# Altium PCB PIPOCPUD_2006.PCBDOC (part 3 of 10)
Units mm, origin at the board's own origin, x right, y up, seen from the top; angles counter-clockwise.
Board outline 179.96 x 114.94 mm, 2 copper layers (Top Layer, Top, Bottom Layer, Bottom), stack 1.341 mm thick; 247 components, 222 nets, 910 pads, 491 vias.
Unrouted connection lines stored in the file: 2.
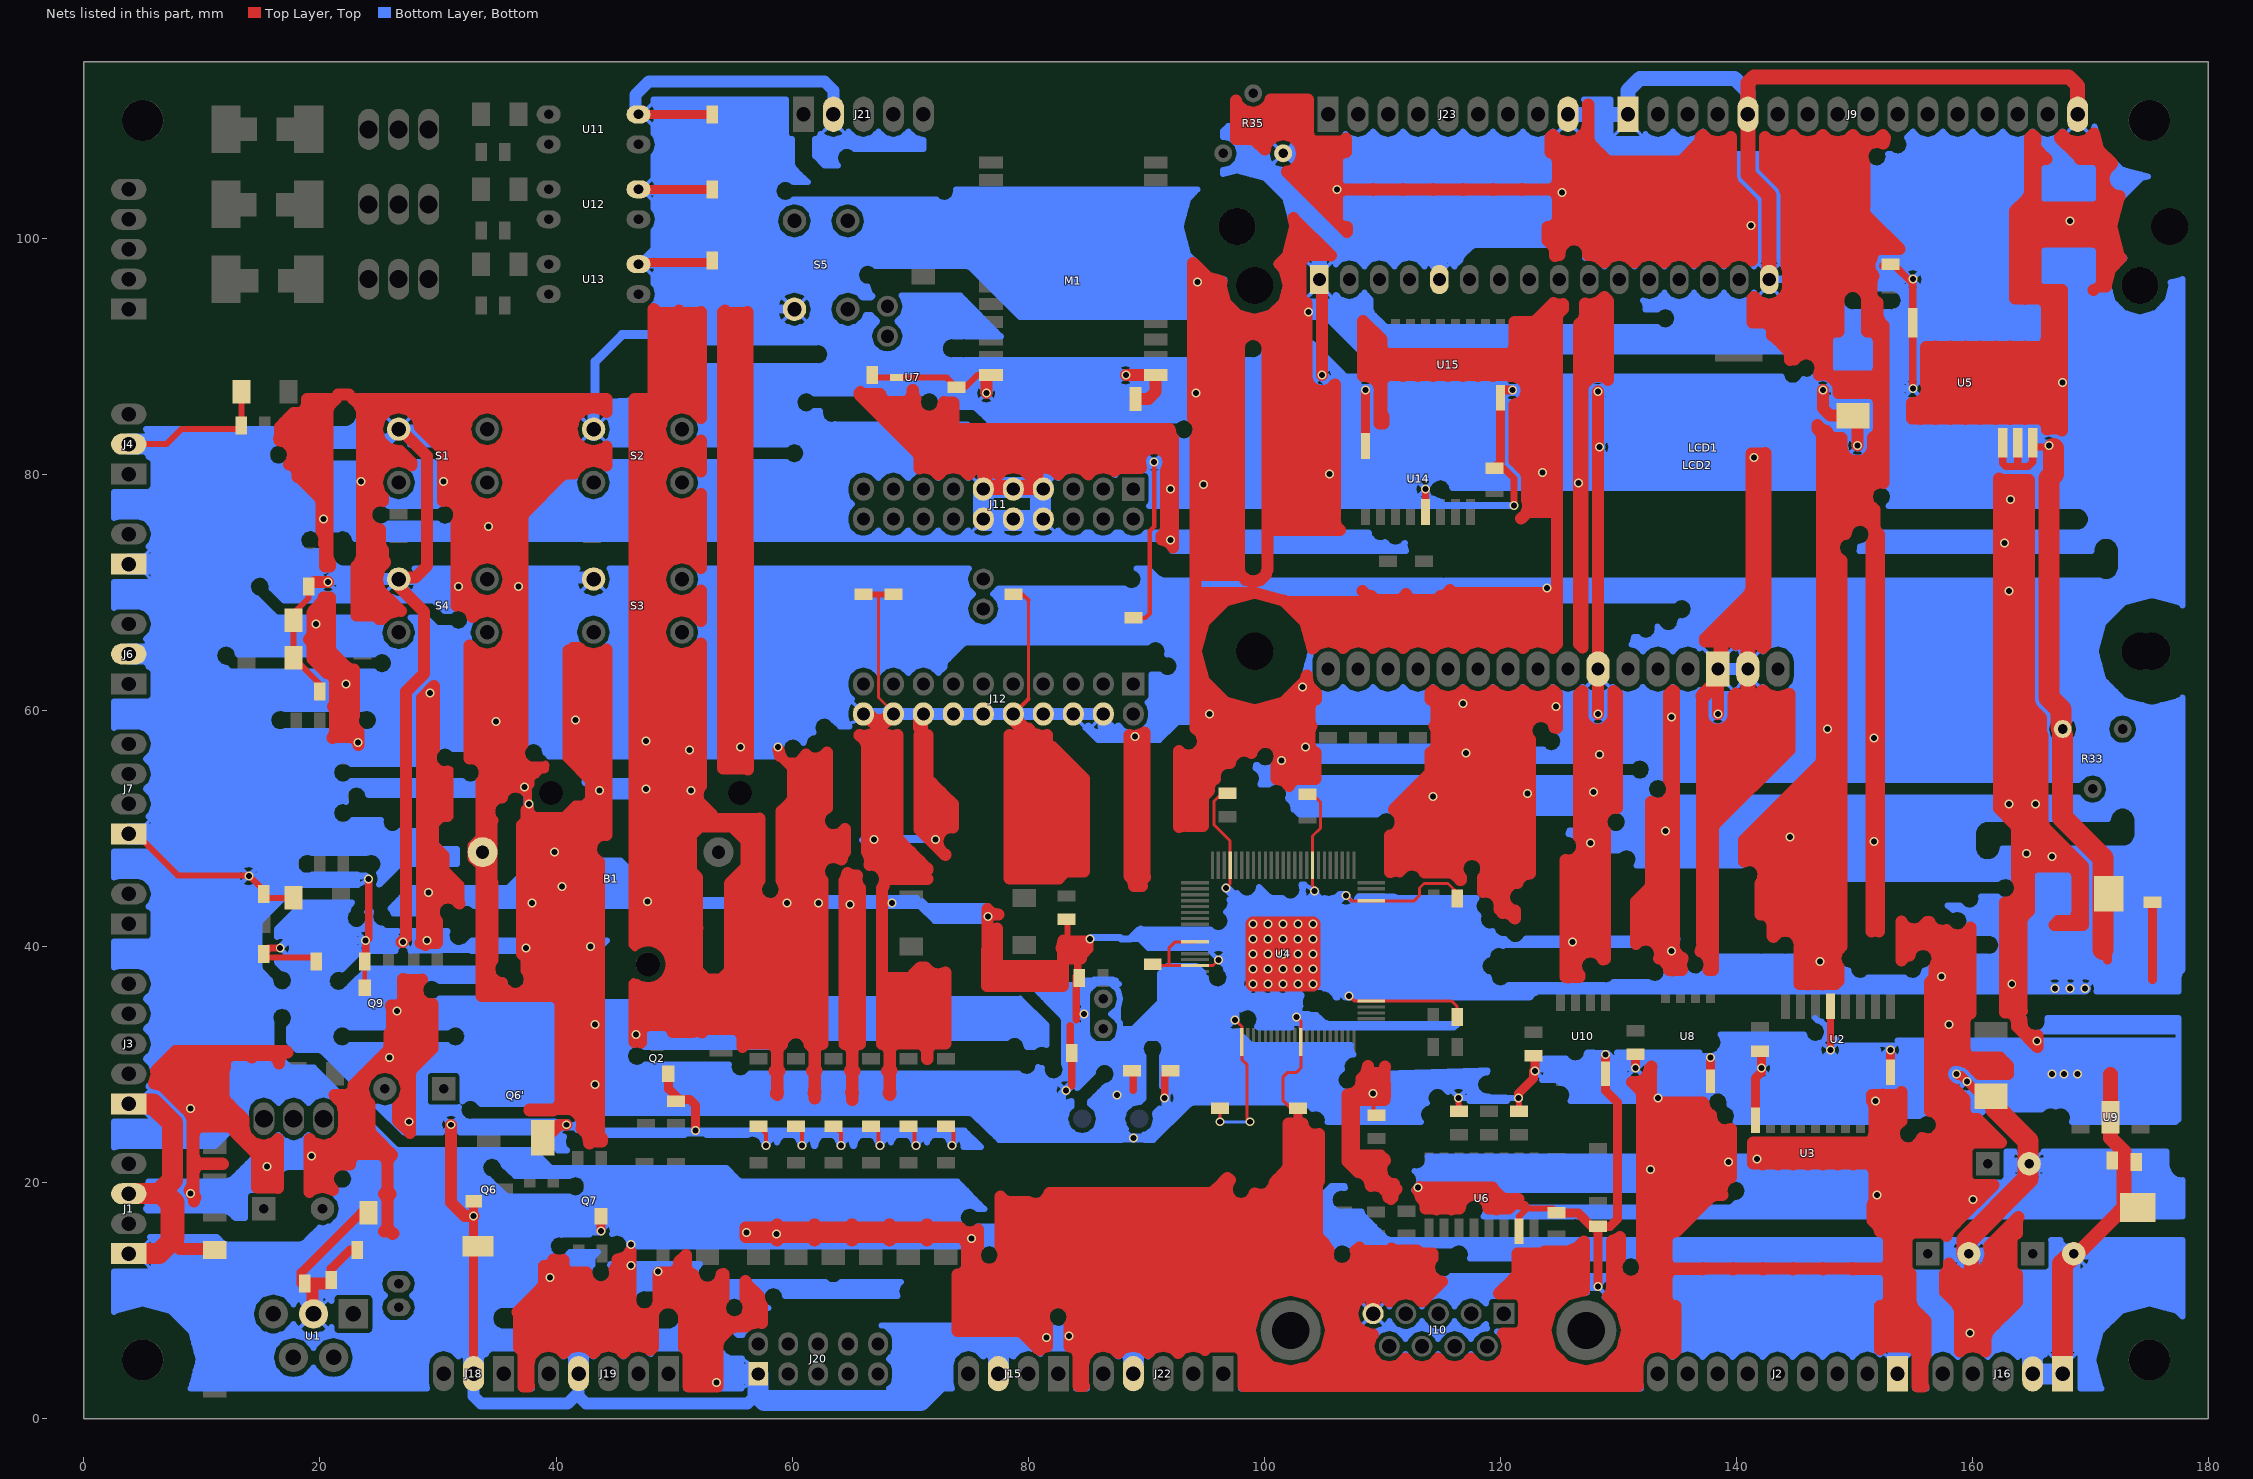
[diagram p3: the nets of this part, all layers, seen from the top]

## Via types
v1: diameter 0.762, hole 0.508, Top Layer, Top to Bottom Layer, Bottom, 489 vias
v2: diameter 0.864, hole 0.813, Top Layer, Top to Bottom Layer, Bottom, 2 vias

## Nets (pads, with @x,y where several pads share a name; then routed paths per layer and width w, separated by ;. In a path a pad name is that pad's centre, name@x,y a point inside that pad or via, vN(x,y) a via of type N, cw(c..) or ccw(c..) an arc to the next point about the centre after c; other vN are vias at no path point) (continued)
GND: (continued)
  Top Layer, Top w1.016: 6.02,19.05 6.985,18.085 6.985,14.605 ; 6.147,29.058 11.811,29.058 ; 6.299,28.296 11.811,28.296 ; 6.477,29.82 11.938,29.82 ; 7.239,30.582 12.217,30.582 ; 7.341,27.534 11.811,27.534 ; 7.62,14.859 8.128,14.351 11.176,14.351 R6.2@11.1,14.275 ; 8.103,26.772 12.116,26.772 ; v1@8.865,26.01 12.878,26.01 ; v1@9.093,19.152 v1@9.296,19.152 ; 9.195,19.914 9.296,19.914 ; 9.195,20.676 9.296,20.676 ; 9.195,21.438 9.652,21.438 ; 9.195,22.2 9.296,22.2 ; 9.195,22.962 9.296,22.962 ; 9.195,23.724 9.296,23.724 ; 9.195,24.486 9.525,24.486 ; 9.195,25.248 13.538,25.248 ; 12.649,24.486 13.564,24.486 ; 13.335,23.724 13.97,23.724 ; 14.097,22.962 16.459,22.962 ; 14.605,22.2 16.459,22.2 ; 14.656,19.914 16.459,19.914 ; 14.656,20.676 16.459,20.676 ; 14.656,21.438 16.459,21.438 ; 16.231,30.582 16.612,30.582 ; 16.612,83.617 20.65,83.617 ; 16.662,82.855 20.65,82.855 ; 16.967,84.379 20.65,84.379 ; 17.628,82.093 20.65,82.093 ; 17.653,81.331 20.65,81.331 ; 17.729,85.141 20.65,85.141 ; 17.882,80.569 20.65,80.569 ; 18.085,79.807 20.65,79.807 ; 18.898,85.903 20.853,85.903 ; 18.974,79.045 20.65,79.045 ; 19.101,19.431 19.482,19.431 ; 19.101,20.193 20.676,20.193 ; 19.101,20.955 20.853,20.955 ; 19.101,21.717 22.555,21.717 ; v1@19.101,22.479 25.959,22.479 ; 19.101,23.241 19.812,23.241 ; 19.355,64.668 21.234,64.668 ; 19.355,65.43 20.853,65.43 ; 19.355,66.954 20.853,66.954 ; 19.355,67.716 20.853,67.716 ; U1.3@19.456,8.865 19.456,8.661 19.355,8.56 19.355,10.795 C48.1@18.72,11.43 C5.1@20.625,11.43 ; 19.507,68.478 20.853,68.478 ; 19.558,70.866 v1(20.701,70.866) ; 19.736,78.283 20.65,78.283 ; 19.812,63.906 21.996,63.906 ; 20.117,75.235 20.65,75.235 ; v1@20.117,75.997 20.65,75.997 ; 20.117,76.759 20.65,76.759 ; 20.117,77.521 20.65,77.521 ; 20.193,69.24 20.853,69.24 ; 20.396,74.473 20.65,74.473 ; 20.422,72.949 20.65,72.949 ; 20.422,73.711 20.65,73.711 ; 20.65,63.144 22.885,63.144 ; 20.803,23.241 25.197,23.241 ; 20.853,66.192 19.253,66.192 ; 20.93,19.431 21.057,19.431 ; 21.133,57.81 23.266,57.81 ; 21.234,60.096 22.885,60.096 ; 21.285,58.572 22.911,58.572 ; 21.285,59.334 22.809,59.334 ; 21.285,60.858 22.885,60.858 ; 21.285,61.62 22.885,61.62 ; 21.285,62.382 22.885,62.382 ; 21.514,86.766 22.454,86.766 ; 21.539,27.051 23.851,27.051 ; 21.971,26.289 24.206,26.289 ; 22.022,24.765 24.206,24.765 ; 22.022,25.527 24.206,25.527 ; 22.784,27.813 23.647,27.813 ; 23.089,68.25 25.883,68.25 ; 23.089,69.012 26.264,69.012 ; 23.089,69.774 25.451,69.774 ; 23.089,70.536 24.943,70.536 ; 23.089,71.298 24.841,71.298 ; 23.089,72.06 25.044,72.06 ; 23.368,85.776 44.272,85.776 ; 23.47,72.822 25.4,72.822 ; 23.546,73.584 25.349,73.584 ; 23.546,74.346 25.095,74.346 ; 23.546,75.108 25.095,75.108 ; 23.546,75.87 24.155,75.87 ; 23.546,76.632 23.901,76.632 ; 23.546,77.394 24.257,77.394 ; 23.546,78.156 25.248,78.156 ; 23.546,78.918 24.892,78.918 ; v1@23.546,79.68 24.892,79.68 ; 23.546,80.442 25.248,80.442 ; 23.546,81.204 27.534,81.204 ; 23.546,81.966 26.594,81.966 ; 23.546,82.728 25.197,82.728 ; 23.546,83.49 24.867,83.49 ; 23.546,84.252 24.917,84.252 ; 23.546,85.014 25.298,85.014 ; 23.8,28.575 23.165,28.575 ; 23.927,29.337 24.359,29.337 ; 24.435,24.003 21.844,24.003 ; 24.689,30.099 28.27,30.099 ; 25.451,30.861 29.032,30.861 ; 25.603,18.847 25.425,19.025 25.603,19.202 25.705,19.507 25.705,21.717 25.603,22.022 25.298,22.327 24.994,22.428 23.241,22.428 22.936,22.327 22.631,22.022 22.555,21.717 ; 25.654,18.669 25.756,18.669 ; 25.679,19.431 25.73,19.431 ; 25.679,21.717 25.73,21.717 ; 25.705,16.383 25.73,16.383 ; 25.705,17.145 25.73,17.145 ; 25.705,17.907 25.73,17.907 ; 25.705,18.542 25.705,16.332 25.603,16.027 25.425,15.85 25.73,15.85 26.035,15.748 26.162,15.621 26.213,15.697 26.111,15.723 25.806,16.027 25.73,16.332 25.73,18.542 25.806,18.847 25.984,19.025 25.806,19.202 25.73,19.507 25.73,21.717 ; 25.705,20.193 25.73,20.193 ; 25.705,20.955 25.73,20.955 ; 25.883,31.623 29.54,31.623 ; 25.883,32.385 29.54,32.385 ; 26.086,33.147 29.54,33.147 ; 26.086,33.909 29.54,33.909 ; 26.086,34.671 29.54,34.671 ; 26.594,25.527 27.635,25.527 ; 26.594,26.289 27.635,26.289 ; 26.619,29.337 27.661,29.337 ; S1.1@26.67,83.82 26.797,83.82 29.083,81.534 29.083,72.263 28.067,71.247 26.67,71.247 S4.1@26.67,71.12 26.543,70.993 26.543,70.612 28.829,68.326 28.829,63.119 27.305,61.595 27.305,40.767 26.924,40.386 v1(27.051,40.386) ; 26.721,81.966 26.772,81.966 ; 26.975,35.433 28.626,35.433 ; 27.051,24.765 27.635,24.765 ; 27.051,36.195 28.245,36.195 ; 27.051,36.957 28.423,36.957 ; 27.127,27.051 27.635,27.051 ; 27.178,28.575 27.635,28.575 ; 27.33,27.813 27.635,27.813 ; 28.016,85.014 32.791,85.014 ; 28.397,84.252 32.41,84.252 ; 28.626,40.869 29.921,40.869 ; 28.626,41.631 29.921,41.631 ; 28.626,42.393 29.743,42.393 ; 28.626,43.155 29.667,43.155 ; 28.626,43.917 30.175,43.917 ; 28.626,51.537 30.81,51.537 ; 28.626,52.299 30.81,52.299 ; 28.626,53.061 30.81,53.061 ; 28.626,53.823 30.81,53.823 ; 28.626,54.585 30.81,54.585 ; 28.626,55.347 29.54,55.347 ; 28.626,56.109 29.388,56.109 ; 28.626,56.871 29.667,56.871 ; 28.626,57.633 29.667,57.633 ; 28.626,58.395 29.667,58.395 ; 28.626,59.157 29.667,59.157 ; 28.626,59.919 29.667,59.919 ; 28.626,60.681 29.667,60.681 ; 28.981,83.49 32.36,83.49 ; v1@29.032,61.443 v1@29.667,61.443 ; 29.743,82.728 32.69,82.728 ; 30.328,81.966 34.087,81.966 ; 30.404,78.156 32.741,78.156 ; 30.404,78.918 32.385,78.918 ; v1@30.404,79.68 32.385,79.68 ; 30.404,80.442 32.741,80.442 ; 30.404,81.204 44.272,81.204 ; 30.81,54.813 30.607,54.762 29.972,54.915 29.515,55.372 29.362,56.007 29.515,56.617 29.667,56.744 29.667,62.078 28.626,61.036 28.626,41.021 28.626,40.488 28.524,40.284 28.829,40.208 28.931,40.107 29.032,40.208 29.337,40.31 29.921,40.31 29.921,42.164 29.769,42.291 29.616,42.926 29.769,43.536 30.226,43.993 30.861,44.145 31.471,43.993 31.826,43.637 ; v1(31.115,24.892) 31.115,18.288 32.258,17.145 v1(33.02,17.145) ; 31.471,77.394 37.948,77.394 ; 31.547,69.012 37.16,69.012 ; 31.547,69.774 32.944,69.774 ; v1@31.547,70.536 32.436,70.536 ; 31.547,71.298 32.334,71.298 ; 31.547,72.06 32.537,72.06 ; 31.547,72.822 33.553,72.822 ; 31.547,73.584 37.16,73.584 ; 31.547,74.346 37.16,74.346 ; 31.547,75.108 37.16,75.108 ; 31.572,75.87 37.16,75.87 ; 31.826,76.632 37.262,76.632 ; 32.69,56.058 36.932,56.058 ; 32.69,56.82 36.957,56.82 ; 32.69,57.582 37.16,57.582 ; 32.69,58.344 37.16,58.344 ; 32.69,59.106 37.16,59.106 ; 32.69,59.868 37.16,59.868 ; 32.69,60.63 37.16,60.63 ; 32.69,61.392 37.16,61.392 ; 32.69,62.154 37.16,62.154 ; 32.69,62.916 37.16,62.916 ; 32.69,63.678 37.16,63.678 ; 32.69,64.44 37.16,64.44 ; 32.69,65.202 32.995,65.202 ; 32.817,68.25 33.376,68.25 ; 33.706,36.246 35.839,36.246 ; 33.706,37.008 34.976,37.008 ; 33.706,37.77 34.392,37.77 ; 33.706,38.532 34.417,38.532 ; 33.706,39.294 34.62,39.294 ; 33.706,40.056 34.62,40.056 ; 33.706,40.818 34.62,40.818 ; 33.706,41.58 34.62,41.58 ; 33.706,42.342 34.62,42.342 ; 33.706,43.104 34.62,43.104 ; 33.706,43.866 34.62,43.866 ; 33.706,44.628 34.62,44.628 ; 33.706,45.034 33.706,35.789 39.675,35.789 39.98,35.687 40.284,35.382 40.386,35.077 40.386,26.873 40.284,26.568 39.98,26.264 39.675,26.187 37.77,26.187 37.77,26.086 37.77,26.111 39.726,26.111 39.98,26.213 41.148,26.213 41.631,26.01 42.012,25.629 42.215,25.146 42.215,24.613 42.164,24.562 42.189,24.562 42.647,24.105 42.799,23.495 42.774,23.343 42.824,23.292 42.901,23.368 43.205,23.47 43.891,23.47 43.891,23.724 43.764,23.851 43.688,24.003 43.637,24.181 43.637,47.168 43.561,47.168 43.104,47.625 42.951,48.26 43.104,48.87 43.561,49.327 44.196,49.479 44.272,49.454 44.272,65.151 44.094,64.999 43.18,64.745 42.24,64.999 41.961,65.278 41.453,65.278 41.3,65.126 41.072,65.049 41.072,58.293 ; 33.706,45.39 33.706,51.613 33.706,45.288 33.909,45.085 34.544,45.085 34.544,50.546 34.544,46.99 33.782,46.228 33.782,46.736 33.02,47.498 33.02,48.514 33.528,49.022 33.528,48.006 34.62,45.39 ; 33.706,50.724 34.569,50.724 ; 33.706,51.003 33.706,53.975 33.833,54.102 33.985,54.737 33.833,55.347 33.376,55.804 32.766,55.956 32.69,55.931 32.69,65.507 33.223,64.973 34.163,64.719 35.077,64.973 35.763,65.659 36.017,66.599 35.763,67.513 35.077,68.199 34.163,68.453 33.223,68.199 32.918,67.894 32.817,68.301 32.36,68.758 31.75,68.91 31.547,68.859 31.547,75.819 31.674,75.946 31.826,76.581 31.674,77.191 31.217,77.648 30.607,77.8 30.404,77.749 30.404,81.788 30.201,82.271 28.473,83.972 28.27,84.734 27.584,85.42 26.67,85.674 25.73,85.42 25.044,84.734 24.79,83.82 25.044,82.88 25.73,82.194 26.67,81.94 26.746,81.966 27.762,80.975 27.762,80.747 27.584,80.899 26.67,81.153 25.73,80.899 25.044,80.213 24.79,79.299 25.044,78.359 25.349,78.054 25.349,77.749 25.146,77.8 24.511,77.648 24.054,77.191 23.901,76.581 24.054,75.946 24.511,75.489 25.095,75.336 25.095,75.26 25.095,74.066 25.171,73.762 25.349,73.584 ; 33.706,51.486 34.315,51.486 ; 33.706,52.248 34.671,52.248 ; 33.706,53.01 35.56,53.01 ; 33.706,53.772 37.668,53.772 ; 33.833,55.296 37.516,55.296 ; 33.934,54.534 37.871,54.534 ; 34.214,81.966 43.104,81.966 ; 34.62,45.034 34.62,38.837 34.468,38.71 34.315,38.1 34.468,37.465 34.925,37.008 35.408,36.881 35.484,36.576 35.941,36.119 36.576,35.966 37.186,36.119 37.643,36.576 37.795,37.211 37.643,37.821 37.516,37.948 37.516,38.786 37.44,38.964 37.363,39.116 37.135,39.37 37.135,50.267 37.363,50.521 37.44,50.673 37.516,50.851 37.516,51.562 37.643,51.689 ; 34.62,50.673 34.468,50.8 34.315,51.435 34.468,52.045 34.925,52.502 35.408,52.629 35.484,52.934 35.941,53.391 36.576,53.543 v1@37.186,53.391 ; 34.747,72.822 37.16,72.822 ; 34.925,68.25 37.16,68.25 ; 35.306,65.202 37.16,65.202 ; 35.357,69.774 37.16,69.774 ; 35.509,85.014 41.808,85.014 ; 35.56,78.156 38.71,78.156 ; 35.56,80.442 41.758,80.442 ; 35.611,82.728 41.707,82.728 ; 35.763,72.06 37.16,72.06 ; 35.789,67.488 37.16,67.488 ; 35.839,65.964 37.16,65.964 ; 35.865,70.536 v1@37.16,70.536 ; 35.89,84.252 41.427,84.252 ; 35.916,78.918 39.472,78.918 ; 35.916,79.68 40.234,79.68 ; 35.941,83.49 41.377,83.49 ; 35.966,71.298 37.16,71.298 ; 35.992,66.726 37.16,66.726 ; 36.855,6.528 48.209,6.528 ; 36.855,7.29 48.209,7.29 ; 36.855,8.052 48.209,8.052 ; 36.855,8.814 47.422,8.814 ; 37.135,5.766 38.303,5.766 ; v1@37.135,40.056 43.637,40.056 ; 37.135,40.818 43.637,40.818 ; 37.135,41.58 43.637,41.58 ; 37.135,42.342 43.637,42.342 ; 37.135,43.104 43.637,43.104 ; 37.135,43.866 43.637,43.866 ; 37.135,44.628 43.637,44.628 ; 37.135,45.39 43.637,45.39 ; 37.135,46.152 43.637,46.152 ; 37.135,46.914 43.637,46.914 ; 37.135,47.676 43.104,47.676 ; 37.135,48.438 43.002,48.438 ; 37.135,49.2 43.434,49.2 ; 37.135,49.962 44.272,49.962 ; 37.211,39.294 43.637,39.294 ; 37.262,3.48 37.668,3.48 ; 37.262,4.242 37.668,4.242 ; 37.262,5.004 37.744,5.004 ; 37.287,9.576 46.38,9.576 ; 37.287,36.246 43.637,36.246 ; 37.44,50.724 44.272,50.724 ; 37.516,38.532 43.637,38.532 ; 37.643,37.77 43.637,37.77 ; 37.744,37.008 43.637,37.008 ; 38.049,10.338 46.304,10.338 ; 38.1,55.143 37.465,55.296 37.008,55.753 36.855,56.388 37.008,56.998 37.16,57.125 37.16,76.378 37.211,76.556 37.287,76.708 40.488,79.908 40.64,79.985 40.818,80.061 41.504,80.061 41.554,80.213 42.24,80.899 43.18,81.153 44.094,80.899 44.272,80.747 44.272,82.347 44.094,82.194 43.18,81.94 42.24,82.194 41.554,82.88 41.3,83.82 41.554,84.734 42.24,85.42 43.18,85.674 44.094,85.42 44.272,85.268 44.272,86.36 22.809,86.36 22.911,86.309 23.317,85.903 23.546,85.369 23.546,74.574 23.546,72.974 23.317,72.441 23.089,72.212 23.089,68.047 24.486,68.047 24.79,67.945 25.019,67.742 25.248,67.742 25.73,68.199 26.67,68.453 26.873,68.402 25.781,69.469 25.73,69.494 25.044,70.18 24.79,71.12 25.044,72.034 25.527,72.517 25.349,72.974 25.349,73.584 ; 38.786,11.1 46.304,11.1 ; Q6'.3@38.887,23.8 39.345,24.257 39.624,24.257 40.259,24.892 v1(40.894,24.892) ; 38.964,11.862 42.697,11.862 ; 38.964,12.624 40.843,12.624 ; 39.751,13.386 40.234,13.386 ; 40.056,26.34 43.637,26.34 ; 40.208,35.484 43.637,35.484 ; 40.361,13.386 40.615,13.386 ; 40.386,27.102 43.637,27.102 ; 40.386,27.864 43.637,27.864 ; 40.386,28.626 43.637,28.626 ; 40.386,29.388 43.637,29.388 ; 40.386,30.15 43.637,30.15 ; 40.386,30.912 43.637,30.912 ; 40.386,31.674 43.637,31.674 ; 40.386,32.436 43.637,32.436 ; 40.386,33.198 43.637,33.198 ; 40.386,33.96 43.637,33.96 ; 40.386,34.722 43.637,34.722 ; 40.411,5.766 40.843,5.766 ; 41.072,56.058 44.272,56.058 ; 41.072,56.82 44.272,56.82 ; 41.072,57.582 44.272,57.582 ; 41.072,58.344 44.272,58.344 ; 41.072,59.106 44.272,59.106 ; 41.072,59.868 44.272,59.868 ; 41.072,60.63 44.272,60.63 ; 41.072,61.392 44.272,61.392 ; 41.072,62.154 44.272,62.154 ; 41.072,62.916 44.272,62.916 ; 41.072,63.678 44.272,63.678 ; 41.072,64.44 44.272,64.44 ; 41.377,65.202 42.037,65.202 ; 41.885,51.486 44.272,51.486 ; 41.885,55.296 44.272,55.296 ; 42.012,25.578 43.637,25.578 ; 42.215,24.816 43.637,24.816 ; 42.647,24.054 43.688,24.054 ; 42.951,5.766 43.383,5.766 ; 43.231,81.966 44.272,81.966 ; 44.907,11.862 46.304,11.862 ; 44.958,12.624 v1@46.304,12.624 ; 45.187,13.386 46.304,13.386 ; 45.491,5.766 45.923,5.766 ; 46.279,14.148 46.304,14.148 ; v1@46.66,32.436 47.193,32.436 ; 46.66,33.198 47.523,33.198 ; 46.66,33.96 62.56,33.96 ; 46.66,34.722 62.56,34.722 ; 46.66,35.484 62.56,35.484 ; 46.66,35.941 46.66,31.902 46.863,31.953 47.193,31.877 47.193,32.614 47.269,32.944 47.574,33.249 47.904,33.325 49.2,33.325 49.53,33.249 49.835,32.944 49.886,32.766 51.613,32.766 51.74,32.817 52.121,32.817 52.349,32.715 52.553,32.893 52.857,32.995 55.067,32.995 55.372,32.893 55.677,32.588 55.778,32.283 55.778,31.496 55.956,31.674 56.261,31.775 58.014,31.775 58.318,31.674 58.623,31.369 58.725,31.064 58.725,29.87 58.623,29.566 58.522,29.464 58.623,29.362 58.725,29.058 58.725,27.864 58.649,27.584 58.649,27.508 58.725,27.508 58.776,27.432 58.801,27.584 58.75,27.864 ; 46.66,36.246 62.56,36.246 ; 46.66,40.818 51.105,40.818 ; 46.66,40.919 46.66,86.36 48.26,86.36 48.26,94.005 48.514,93.751 48.819,93.675 50.013,93.675 50.317,93.751 50.419,93.853 50.521,93.751 50.825,93.675 52.019,93.675 52.273,93.726 52.273,84.76 51.587,85.42 50.673,85.674 49.733,85.42 49.047,84.734 48.793,83.82 49.047,82.88 49.733,82.194 50.673,81.94 51.587,82.194 52.273,82.855 52.273,80.239 51.587,80.899 50.673,81.153 49.733,80.899 49.047,80.213 48.793,79.299 49.047,78.359 49.733,77.673 50.673,77.419 51.587,77.673 52.273,78.334 52.273,72.06 51.587,72.72 50.673,72.974 49.733,72.72 49.047,72.034 48.793,71.12 49.047,70.18 49.733,69.494 50.673,69.24 51.587,69.494 52.273,70.155 52.273,67.564 51.587,68.224 50.673,68.478 49.733,68.224 49.047,67.539 48.793,66.624 49.047,65.684 49.733,64.999 50.673,64.745 51.587,64.999 52.273,65.659 52.273,53.569 52.121,53.442 51.968,52.832 52.121,52.197 52.578,51.74 ; 46.66,41.58 51.994,41.58 ; 46.66,43.104 51.105,43.104 ; 46.66,43.866 51.257,43.866 ; 46.66,44.628 51.359,44.628 ; 46.66,46.152 51.613,46.152 ; 46.66,46.914 51.13,46.914 ; 46.66,47.676 51.13,47.676 ; 46.66,48.438 50.851,48.438 ; 46.66,49.2 51.105,49.2 ; 46.66,49.962 51.511,49.962 ; 46.66,50.724 57.226,50.724 ; 46.66,51.486 52.248,51.486 ; 46.66,52.248 52.121,52.248 ; 46.66,53.01 52.019,53.01 ; 46.66,53.772 52.273,53.772 ; 46.66,54.534 52.273,54.534 ; 46.66,55.296 52.273,55.296 ; 46.66,56.058 52.273,56.058 ; 46.66,56.82 52.273,56.82 ; 46.66,57.582 52.273,57.582 ; 46.66,58.344 52.273,58.344 ; 46.66,59.106 52.273,59.106 ; 46.66,59.868 52.273,59.868 ; 46.66,60.63 52.273,60.63 ; 46.66,61.392 52.273,61.392 ; 46.66,62.154 52.273,62.154 ; 46.66,62.916 52.273,62.916 ; 46.66,63.678 52.273,63.678 ; 46.66,64.44 52.273,64.44 ; 46.66,65.202 49.53,65.202 ; 46.66,65.964 48.971,65.964 ; 46.66,66.726 48.819,66.726 ; 46.66,67.488 49.022,67.488 ; 46.66,68.25 49.784,68.25 ; 46.66,69.012 52.273,69.012 ; 46.66,69.774 49.454,69.774 ; 46.66,70.536 48.946,70.536 ; 46.66,71.298 48.844,71.298 ; 46.66,72.06 49.047,72.06 ; 46.66,72.822 50.063,72.822 ; 46.66,73.584 52.273,73.584 ; 46.66,74.346 52.273,74.346 ; 46.66,75.108 52.273,75.108 ; 46.66,75.87 52.273,75.87 ; 46.66,76.632 52.273,76.632 ; 46.66,77.394 52.273,77.394 ; 46.66,78.156 49.251,78.156 ; 46.66,78.918 48.895,78.918 ; 46.66,79.68 48.895,79.68 ; 46.66,80.442 49.251,80.442 ; 46.66,81.204 52.273,81.204 ; 46.66,81.966 50.597,81.966 ; 46.66,82.728 49.2,82.728 ; 46.66,83.49 48.87,83.49 ; 46.66,84.252 48.92,84.252 ; 46.66,85.014 49.301,85.014 ; 46.66,85.776 52.273,85.776 ; 47.549,8.814 48.209,8.814 ; 48.26,86.538 52.273,86.538 ; 48.26,87.3 52.273,87.3 ; 48.26,88.062 52.273,88.062 ; 48.26,88.824 52.273,88.824 ; 48.26,89.586 52.273,89.586 ; 48.26,90.348 52.273,90.348 ; 48.26,91.11 52.273,91.11 ; 48.26,91.872 52.273,91.872 ; 48.26,92.634 52.273,92.634 ; 48.26,93.396 52.273,93.396 ; 48.59,9.576 48.717,9.576 ; 48.692,10.338 54.178,10.338 ; 48.692,11.1 52.756,11.1 ; 48.692,11.862 51.714,11.862 ; 49.581,33.198 62.56,33.198 ; 50.089,39.294 51.359,39.294 ; 50.165,12.624 51.079,12.624 ; 50.165,48.768 51.689,50.292 52.959,50.292 ; 50.19,37.77 50.876,37.77 ; 50.317,9.576 53.924,9.576 ; 50.444,37.008 51.359,37.008 62.56,37.008 ; 50.521,13.386 51.029,13.386 ; 50.724,81.966 52.273,81.966 ; 50.8,49.276 51.308,49.276 52.197,50.165 52.451,50.165 52.578,50.292 53.086,50.292 53.213,50.419 55.626,50.419 56.261,49.784 56.134,50.165 56.515,49.784 56.515,46.609 55.499,45.593 54.991,45.593 ; 50.825,8.814 54.026,8.814 ; 50.851,6.528 53.772,6.528 ; 50.851,7.29 54.381,7.29 ; 50.851,8.052 56.617,8.052 ; 51.105,5.766 53.67,5.766 ; 51.232,3.48 53.67,3.48 ; 51.232,4.242 53.67,4.242 ; 51.232,5.004 53.67,5.004 ; 51.257,72.822 52.273,72.822 ; 51.435,46.736 50.165,39.497 50.165,40.64 48.514,42.291 47.244,42.291 50.8,42.291 51.562,43.053 51.562,45.593 47.117,45.593 47.498,45.212 50.927,45.212 50.927,38.1 51.943,37.084 52.832,37.084 51.943,37.973 51.943,45.847 51.435,46.355 51.435,49.022 ; 51.537,68.25 52.273,68.25 ; 51.791,65.202 52.273,65.202 ; 51.867,69.774 52.273,69.774 ; 52.019,85.014 52.273,85.014 ; 52.07,78.156 52.273,78.156 ; 52.07,80.442 52.273,80.442 ; 52.121,82.728 52.273,82.728 ; 52.883,11.1 54.178,11.1 ; 53.924,11.862 54.178,11.862 ; 54.153,55.296 56.21,55.296 ; 54.153,55.448 54.153,93.726 54.229,93.751 54.331,93.853 54.432,93.751 54.737,93.675 55.931,93.675 56.21,93.726 56.261,54.991 56.185,55.067 56.083,55.067 54.153,55.067 56.21,55.067 ; 54.153,56.058 56.21,56.058 ; 54.153,56.82 56.21,56.82 ; 54.153,57.582 56.21,57.582 ; 54.153,58.344 56.21,58.344 ; 54.153,59.106 56.21,59.106 ; 54.153,59.868 56.21,59.868 ; 54.153,60.63 56.21,60.63 ; 54.153,61.392 56.21,61.392 ; 54.153,62.154 56.21,62.154 ; 54.153,62.916 56.21,62.916 ; 54.153,63.678 56.21,63.678 ; 54.153,64.44 56.21,64.44 ; 54.153,65.202 56.21,65.202 ; 54.153,65.964 56.21,65.964 ; 54.153,66.726 56.21,66.726 ; 54.153,67.488 56.21,67.488 ; 54.153,68.25 56.21,68.25 ; 54.153,69.012 56.21,69.012 ; 54.153,69.774 56.21,69.774 ; 54.153,70.536 56.21,70.536 ; 54.153,71.298 56.21,71.298 ; 54.153,72.06 56.21,72.06 ; 54.153,72.822 56.21,72.822 ; 54.153,73.584 56.21,73.584 ; 54.153,74.346 56.21,74.346 ; 54.153,75.108 56.21,75.108 ; 54.153,75.87 56.21,75.87 ; 54.153,76.632 56.21,76.632 ; 54.153,77.394 56.21,77.394 ; 54.153,78.156 56.21,78.156 ; 54.153,78.918 56.21,78.918 ; 54.153,79.68 56.21,79.68 ; 54.153,80.442 56.21,80.442 ; 54.153,81.204 56.21,81.204 ; 54.153,81.966 56.21,81.966 ; 54.153,82.728 56.21,82.728 ; 54.153,83.49 56.21,83.49 ; 54.153,84.252 56.21,84.252 ; 54.153,85.014 56.21,85.014 ; 54.153,85.776 56.21,85.776 ; 54.153,86.538 56.21,86.538 ; 54.153,87.3 56.21,87.3 ; 54.153,88.062 56.21,88.062 ; 54.153,88.824 56.21,88.824 ; 54.153,89.586 56.21,89.586 ; 54.153,90.348 56.21,90.348 ; 54.153,91.11 56.21,91.11 ; 54.153,91.872 56.21,91.872 ; 54.153,92.634 56.21,92.634 ; 54.153,93.396 56.21,93.396 ; 55.169,40.818 62.56,40.818 ; 55.296,39.294 62.56,39.294 ; 55.296,43.866 57.429,43.866 ; 55.499,49.784 56.134,49.149 56.134,46.736 54.991,45.593 ; 55.55,43.104 55.55,41.986 56.007,41.529 61.849,41.529 61.849,42.545 56.007,42.545 56.007,43.053 61.341,43.053 62.56,43.104 ; 55.728,32.436 59.563,32.436 ; 55.778,31.674 55.931,31.674 ; 55.931,46.152 57.226,46.152 ; 55.956,49.962 57.226,49.962 ; 56.058,10.338 57.175,10.338 ; 56.058,11.1 56.439,11.1 ; v1@56.058,15.672 75.768,15.672 ; 56.058,37.77 57.099,37.77 62.56,37.77 ; 56.185,8.814 57.429,8.814 ; 56.21,44.628 56.972,44.628 ; 56.21,47.676 57.226,47.676 ; 56.21,49.2 57.226,49.2 ; 56.286,9.576 57.429,9.576 ; 56.337,48.438 57.226,48.438 ; 56.642,46.101 56.642,47.244 56.769,45.974 55.626,44.831 56.261,45.72 55.245,44.704 55.245,40.259 55.88,40.894 55.88,44.958 56.007,44.831 56.007,43.561 56.007,38.608 61.849,38.608 61.849,40.132 55.626,40.132 55.626,37.973 54.864,37.211 54.229,37.211 54.991,37.973 54.991,39.37 54.737,39.624 54.737,45.339 54.991,45.593 ; 57.226,50.851 57.226,45.568 57.074,45.441 56.921,44.831 57.074,44.196 57.531,43.739 58.166,43.586 58.776,43.739 59.233,44.196 59.385,44.831 59.233,45.441 59.106,45.568 ; 58.344,31.674 59.106,31.674 ; 58.623,29.388 58.826,29.388 ; 58.699,16.434 58.75,16.434 ; 58.699,27.864 58.75,27.864 ; 58.725,28.626 58.75,28.626 ; 58.725,30.15 58.75,30.15 ; 58.725,30.912 58.75,30.912 ; v1@58.852,56.693 58.979,56.134 ; 58.877,43.866 v1@62.56,43.866 ; 59.106,46.152 62.306,46.152 ; 59.106,46.914 62.408,46.914 ; 59.106,47.676 64.262,47.676 ; 59.106,48.438 64.465,48.438 ; 59.106,49.2 64.465,49.2 ; 59.106,49.962 62.509,49.962 ; 59.106,50.724 62.255,50.724 ; 59.106,51.486 62.611,51.486 ; 59.182,48.514 59.182,51.308 59.944,52.07 ; 59.233,45.39 62.56,45.39 ; 59.334,44.628 62.56,44.628 ; 60.503,54.534 62.941,54.534 ; 60.681,55.677 61.138,56.134 61.163,56.261 61.341,56.058 61.976,55.905 62.586,56.058 62.941,56.413 62.941,51.74 62.865,51.74 62.408,51.283 62.255,50.673 62.408,50.038 62.865,49.581 63.5,49.428 64.11,49.581 64.465,49.936 64.465,47.981 64.313,47.854 64.186,47.346 64.11,47.422 63.5,47.574 62.865,47.422 62.408,46.965 62.255,46.355 62.408,45.72 62.56,45.593 62.56,31.75 62.306,31.674 62.001,31.369 61.925,31.064 61.925,29.87 62.001,29.566 62.078,29.489 62.001,29.388 ; 61.036,56.058 61.417,56.058 ; 61.062,32.436 62.56,32.436 ; 61.519,31.674 62.281,31.674 ; 61.798,29.388 62.001,29.388 ; 61.874,16.434 61.925,16.434 ; 61.874,27.864 61.925,27.864 ; 61.9,28.626 61.925,28.626 ; 61.9,30.15 61.925,30.15 ; 61.9,30.912 61.925,30.912 ; 62.509,56.058 62.941,56.058 ; 64.44,32.309 65.735,32.309 ; 64.44,33.071 65.735,33.071 ; 64.44,33.833 65.735,33.833 ; 64.44,34.595 65.735,34.595 ; 64.44,35.357 65.735,35.357 ; 64.44,36.119 65.735,36.119 ; 64.44,36.881 65.735,36.881 ; 64.44,37.643 65.735,37.643 ; 64.44,38.405 65.735,38.405 ; 64.44,39.167 65.735,39.167 ; 64.44,39.929 65.735,39.929 ; 64.44,40.691 65.735,40.691 ; 64.44,41.453 65.735,41.453 ; 64.44,42.215 65.735,42.215 ; 64.44,42.977 65.735,42.977 ; 64.44,43.739 65.735,43.739 ; 64.44,44.501 65.735,44.501 ; 64.44,45.263 65.557,45.263 ; 64.643,46.025 65.303,46.025 ; 64.821,31.547 65.329,31.547 ; 65.024,27.737 65.126,27.737 ; 65.024,29.261 65.151,29.261 ; 65.049,16.434 65.1,16.434 ; 65.075,28.499 65.1,28.499 ; 65.075,30.023 65.1,30.023 ; 65.075,30.785 65.1,30.785 ; 65.481,46.025 65.507,46.025 ; 65.71,57.887 65.761,57.887 ; 65.71,86.766 67.488,86.766 ; 66.294,57.887 68.301,57.887 ; 66.319,57.125 68.91,57.125 ; 66.345,48.743 69.291,48.743 ; 66.345,49.505 68.91,49.505 ; 66.345,50.267 68.91,50.267 ; 66.345,51.029 68.91,51.029 ; 66.345,51.791 68.91,51.791 ; 66.345,52.553 68.91,52.553 ; 66.345,53.315 68.91,53.315 ; 66.345,54.077 68.91,54.077 ; 66.345,54.839 68.91,54.839 ; 66.345,55.601 68.91,55.601 ; 66.345,56.363 68.91,56.363 ; 66.446,86.004 70.409,86.004 ; 66.624,47.219 70.815,47.219 ; 67.208,85.242 70.79,85.242 ; 67.589,46.457 71.45,46.457 ; 67.615,31.979 72.974,31.979 ; 67.615,32.741 72.974,32.741 ; 67.615,33.503 72.974,33.503 ; 67.615,34.265 72.974,34.265 ; 67.615,35.027 72.974,35.027 ; 67.615,35.789 72.974,35.789 ; 67.615,36.551 72.974,36.551 ; 67.615,37.313 72.974,37.313 ; 67.894,45.695 71.45,45.695 ; 67.97,84.48 73.66,84.48 ; 68.199,29.693 68.301,29.693 ; 68.199,31.217 68.301,31.217 ; 68.224,16.434 68.275,16.434 ; 68.25,28.169 68.275,28.169 ; 68.25,28.931 68.275,28.931 ; 68.25,30.455 68.275,30.455 ; 68.732,83.718 91.999,83.718 ; 68.834,57.887 68.91,57.887 ; 69.494,82.956 92.278,82.956 ; 70.053,47.981 66.345,47.981 ; 70.155,86.766 70.282,86.766 ; 70.256,82.194 90.424,82.194 ; 70.79,50.013 73.101,50.013 ; 70.79,50.775 73.609,50.775 ; 70.79,51.537 73.609,51.537 ; 70.79,52.299 73.355,52.299 ; 70.79,53.061 72.593,53.061 ; 70.79,53.823 71.831,53.823 ; 70.79,54.585 71.45,54.585 ; 70.79,55.347 71.45,55.347 ; 70.79,56.109 71.45,56.109 ; 70.79,56.871 71.45,56.871 ; 70.79,57.633 71.45,57.633 ; 70.79,80.67 89.535,80.67 ; 70.79,81.432 89.535,81.432 ; 71.298,38.227 70.866,38.227 70.231,37.592 70.612,37.592 71.247,38.227 71.755,37.77 72.39,37.617 72.974,37.77 72.974,31.775 72.136,31.775 71.831,31.674 71.526,31.369 71.45,31.064 71.45,30.455 ; 71.374,31.217 71.476,31.217 ; 71.399,16.434 71.45,16.434 ; 71.425,30.455 71.45,30.455 ; 71.45,46.584 69.037,48.997 68.961,49.149 68.91,49.327 68.91,57.912 68.58,57.81 67.691,58.039 67.31,58.445 66.904,58.039 66.04,57.81 65.71,57.912 66.192,57.404 66.269,57.252 66.345,57.074 66.345,47.981 ; 71.45,49.251 v1@72.39,49.251 ; 72.212,48.489 72.39,48.489 ; 72.441,85.242 73.66,85.242 ; 72.822,86.004 73.66,86.004 ; 74.016,8.052 81.458,8.052 ; 74.016,8.814 81.356,8.814 ; 74.016,9.576 81.788,9.576 ; 74.016,10.338 100.355,10.338 ; 74.016,11.1 114.529,11.1 ; 74.016,11.862 114.452,11.862 ; 74.727,12.624 76.632,12.624 ; 74.752,14.91 75.768,14.91 ; 74.828,13.386 75.59,13.386 ; 74.828,14.148 75.54,14.148 ; v1(76.454,86.868) 76.454,88.265 76.784,88.392 M1.13@76.86,88.417 ; 76.53,37.389 82.956,37.389 ; v1@76.556,42.723 77.394,42.723 ; 76.759,12.624 113.995,12.624 ; 77.343,41.529 77.343,38.354 82.931,38.354 82.931,38.735 83.185,38.989 84.455,38.989 ; 77.47,42.697 76.835,42.85 76.556,43.155 76.505,36.627 ; 77.648,14.91 105.029,14.91 ; 77.648,15.672 104.47,15.672 ; 77.648,16.434 104.47,16.434 ; 77.648,17.196 104.47,17.196 ; 77.648,17.958 104.47,17.958 ; 77.648,18.72 77.724,18.72 ; 77.8,13.386 105.486,13.386 ; 77.851,14.148 105.41,14.148 ; 78.41,45.771 81.102,45.771 82.601,45.771 83.185,46.355 84.709,46.355 84.709,54.229 83.058,55.88 83.058,46.482 83.693,46.482 83.947,46.736 83.947,54.483 83.185,55.753 82.042,56.896 82.042,56.007 82.677,55.372 82.677,46.355 82.296,46.355 82.296,55.118 82.55,45.771 ; 78.41,45.898 78.41,57.912 78.74,57.81 79.604,58.039 80.01,58.445 80.391,58.039 81.28,57.81 81.61,57.912 81.61,46.914 81.661,46.736 81.737,46.584 ; 78.41,46.533 81.788,46.533 ; 78.41,47.295 81.61,47.295 ; 78.41,48.057 81.61,48.057 ; 78.41,48.819 81.61,48.819 ; 78.41,49.581 81.61,49.581 ; 78.41,50.343 81.61,50.343 ; 78.41,51.105 81.61,51.105 ; 78.41,51.867 81.61,51.867 ; 78.41,52.629 81.61,52.629 ; 78.41,53.391 81.61,53.391 ; 78.41,54.153 81.61,54.153 ; 78.41,54.915 81.61,54.915 ; 78.41,55.677 81.61,55.677 ; 78.41,56.439 81.61,56.439 ; 78.41,57.201 81.61,57.201 ; 79.248,57.963 80.747,57.963 ; 79.477,7.29 81.61,7.29 ; 80.264,6.528 v1@81.61,6.528 ; 81.61,18.72 97.053,18.72 ; 82.982,40.488 82.829,39.878 82.956,39.421 82.956,39.268 82.956,36.627 ; 83.287,9.576 99.593,9.576 ; 83.49,6.528 99.009,6.528 ; v1@83.49,7.29 98.806,7.29 ; 83.617,8.052 98.908,8.052 ; 83.718,8.814 99.111,8.814 ; 83.82,39.497 83.82,40.259 ; 84.125,5.766 85.293,5.766 ; 84.252,3.48 84.658,3.48 ; 84.252,4.242 84.658,4.242 ; 84.252,5.004 84.734,5.004 ; 84.709,39.497 84.709,40.259 ; 87.401,5.766 87.833,5.766 ; v1(88.265,88.392) M1.22@90.805,88.417 90.805,86.995 90.195,86.385 M1.21@89.078,86.385 ; 88.57,46.66 89.865,46.66 ; 88.57,47.422 89.865,47.422 ; 88.57,48.184 89.865,48.184 ; 88.57,48.946 89.865,48.946 ; 88.57,49.708 89.865,49.708 ; 88.57,50.47 89.865,50.47 ; 88.57,51.232 89.865,51.232 ; 88.57,51.994 89.865,51.994 ; 88.57,52.756 89.865,52.756 ; 88.57,53.518 89.865,53.518 ; 88.57,54.28 89.865,54.28 ; 88.57,55.042 89.865,55.042 ; 88.57,55.804 89.865,55.804 ; 88.57,56.566 89.865,56.566 ; 88.57,57.328 89.865,57.328 ; 88.621,45.898 89.916,45.898 ; 89.789,58.09 89.865,58.09 ; 89.916,45.847 89.865,46.025 89.865,58.141 89.764,58.039 88.9,57.81 88.57,57.912 88.57,45.949 88.824,45.695 88.976,45.136 ; 89.941,5.766 90.373,5.766 ; 90.907,82.194 92.278,82.194 ; 91.288,74.574 v1@92.278,74.574 ; 91.643,75.336 92.278,75.336 ; 91.669,76.098 92.278,76.098 ; 91.669,76.86 92.278,76.86 ; 91.669,77.622 92.278,77.622 ; 91.669,78.384 92.278,78.384 ; 91.669,79.146 92.278,79.146 ; 91.669,79.908 92.278,79.908 ; 91.796,80.67 92.278,80.67 ; 91.796,81.432 92.278,81.432 ; 92.481,5.766 92.913,5.766 ; 92.761,50.876 94.818,50.876 ; 92.761,51.638 94.818,51.638 ; 92.761,52.4 94.818,52.4 ; 92.761,53.162 95.275,53.162 ; 92.761,53.924 95.479,53.924 ; 92.761,54.686 95.885,54.686 ; 92.761,55.448 96.545,55.448 ; 92.761,56.21 93.345,56.21 ; 93.828,56.21 97.46,56.21 ; 93.98,85.166 97.866,85.166 ; 93.98,85.928 97.866,85.928 ; v1@93.98,86.69 97.866,86.69 ; 93.98,87.452 97.866,87.452 ; 93.98,88.214 97.866,88.214 ; 93.98,88.976 97.866,88.976 ; 93.98,89.738 97.866,89.738 ; 93.98,90.5 97.841,90.5 ; 93.98,91.262 97.968,91.262 ; 93.98,92.024 103.581,92.024 ; 93.98,92.786 103.581,92.786 ; 93.98,93.548 97.638,93.548 ; 93.98,94.31 96.876,94.31 ; 93.98,95.072 96.52,95.072 ; 93.98,95.834 96.317,95.834 ; 93.98,96.596 95.453,96.596 ; 93.98,97.358 94.488,97.358 ; 94.158,58.496 103.886,58.496 ; 94.158,59.258 103.835,59.258 ; 94.158,60.02 99.136,60.02 ; 94.158,60.782 96.571,60.782 ; 94.158,61.544 95.809,61.544 ; 94.158,62.306 95.047,62.306 ; 94.158,63.068 94.717,63.068 ; 94.158,63.83 94.513,63.83 ; 94.158,64.592 94.31,64.592 ; 94.158,65.354 94.31,65.354 ; 94.158,66.116 94.513,66.116 ; 94.158,66.878 94.717,66.878 ; 94.158,67.64 95.047,67.64 ; 94.158,68.402 95.809,68.402 ; 94.158,69.164 96.571,69.164 ; 94.158,69.926 99.085,69.926 ; 94.158,71.45 98.019,71.45 ; 94.158,72.212 97.841,72.212 ; 94.158,72.974 97.866,72.974 ; 94.158,73.736 97.866,73.736 ; 94.158,74.498 97.866,74.498 ; 94.158,75.26 97.866,75.26 ; 94.158,76.022 97.866,76.022 ; 94.158,76.784 97.866,76.784 ; 94.158,77.546 97.866,77.546 ; 94.158,78.308 97.866,78.308 ; 94.158,79.07 97.866,79.07 ; 94.158,79.832 97.866,79.832 ; 94.158,80.594 97.866,80.594 ; 94.158,81.356 97.866,81.356 ; 94.158,82.118 97.866,82.118 ; 94.158,82.88 97.866,82.88 ; 94.285,84.404 97.866,84.404 ; 94.412,83.642 97.866,83.642 ; 94.717,56.972 99.289,56.972 ; 94.717,57.734 103.835,57.734 ; 95.987,19.482 96.799,19.482 ; 96.698,20.244 97.053,20.244 ; 97.587,108.61 100.813,108.61 ; 97.587,109.372 103.708,109.372 ; 97.587,110.134 103.708,110.134 ; 97.587,110.896 98.196,110.896 ; 98.095,5.766 99.212,5.766 ; 98.222,3.48 131.623,3.48 ; 98.222,4.242 101.295,4.242 ; 98.222,5.004 99.949,5.004 ; 99.009,18.72 104.47,18.72 ; 99.212,60.02 103.835,60.02 ; 99.695,107.848 100.127,107.848 ; 99.898,110.896 103.708,110.896 ; 100.127,91.262 103.581,91.262 ; 100.254,75.26 106.401,75.26 ; 100.254,76.022 105.969,76.022 ; 100.254,76.784 105.994,76.784 ; 100.254,77.546 105.994,77.546 ; 100.254,78.308 105.994,78.308 ; 100.254,79.07 105.994,79.07 ; 100.254,79.832 105.994,79.832 ; 100.254,80.594 105.994,80.594 ; 100.254,81.356 105.994,81.356 ; 100.254,82.118 105.994,82.118 ; 100.254,82.88 105.994,82.88 ; 100.254,83.642 105.994,83.642 ; 100.254,84.404 105.994,84.404 ; 100.254,85.166 105.994,85.166 ; 100.254,85.928 105.994,85.928 ; 100.254,86.69 105.994,86.69 ; 100.254,87.452 103.937,87.452 ; 100.254,88.214 103.581,88.214 ; 100.254,88.976 103.581,88.976 ; 100.254,89.738 103.581,89.738 ; 100.508,111.658 103.708,111.658 ; 100.66,19.482 104.47,19.482 ; 100.711,93.548 v1@103.581,93.548 ; 100.889,56.972 v1@103.861,56.972 ; 101.041,54.686 104.343,54.686 ; 101.067,20.244 104.648,20.244 ; 101.143,55.448 104.343,55.448 ; 101.295,56.21 104.343,56.21 ; 101.473,94.31 103.581,94.31 ; 101.625,98.12 103.149,98.12 ; 101.702,97.358 103.073,97.358 ; 101.778,53.924 102.311,53.924 ; 101.778,60.782 104.115,60.782 ; 101.778,69.164 124.79,69.164 ; 101.829,21.006 104.648,21.006 ; 101.829,95.072 103.073,95.072 ; 101.905,96.596 103.073,96.596 ; 101.981,105.562 106.147,105.562 ; 102.032,21.768 104.648,21.768 ; 102.032,22.53 104.648,22.53 ; 102.032,23.292 104.648,23.292 ; 102.032,24.054 104.318,24.054 ; 102.032,24.816 103.276,24.816 ; 102.032,95.834 103.073,95.834 ; 102.083,98.882 105.258,98.882 ; 102.286,99.644 104.496,99.644 ; 102.362,108.61 103.759,108.61 ; 102.489,100.406 103.734,100.406 ; 102.54,61.544 104.267,61.544 ; 102.54,68.402 124.79,68.402 ; 102.591,101.168 102.972,101.168 ; 102.743,104.8 106.147,104.8 ; 102.946,106.324 106.147,106.324 ; 103.048,107.848 106.909,107.848 ; 103.149,4.242 126.34,4.242 ; 103.2,107.086 106.401,107.086 ; v1@103.302,62.306 103.708,62.306 ; 103.302,67.64 124.79,67.64 ; 103.505,104.038 106.553,104.038 ; 103.581,90.5 100.254,90.5 ; 103.632,66.878 124.79,66.878 ; 103.835,66.116 124.79,66.116 ; 104.038,65.354 104.216,65.354 ; 104.089,10.338 108.255,10.338 ; 104.267,103.276 106.147,103.276 ; 104.445,24.054 104.648,24.054 ; 104.496,5.004 109.296,5.004 ; LCD2.1@104.673,96.495 104.673,95.86 104.902,95.631 v1(104.902,88.392) ; 104.851,9.576 107.62,9.576 ; 105.029,102.514 106.147,102.514 ; 105.232,5.766 108.915,5.766 ; 105.334,8.814 107.467,8.814 ; 105.435,6.528 108.915,6.528 ; 105.537,8.052 107.671,8.052 ; 105.639,7.29 108.61,7.29 ; 105.791,101.752 106.147,101.752 ; 105.842,87.452 105.994,87.452 ; 106.172,75.514 106.096,75.565 106.045,75.794 105.994,75.946 105.994,76.022 105.943,76.2 105.994,76.352 105.994,87.605 105.639,87.249 105.156,87.071 104.623,87.071 104.14,87.249 103.759,87.63 103.581,88.113 103.581,94.488 103.454,94.513 103.149,94.818 103.073,95.123 103.073,97.841 103.149,98.146 103.454,98.45 103.759,98.552 105.562,98.552 105.639,98.527 102.464,101.702 102.641,100.99 101.981,98.501 101.295,97.815 101.676,97.409 102.057,95.987 101.676,94.539 100.609,93.472 99.187,93.091 97.739,93.472 96.672,94.539 96.291,95.987 96.393,96.342 95.199,96.672 93.98,97.892 93.98,84.734 94.285,84.43 94.437,83.82 94.285,83.185 94.158,83.058 94.158,58.471 94.209,58.471 94.666,58.014 94.818,57.404 94.666,56.769 94.209,56.312 93.599,56.159 92.964,56.312 92.761,56.54 92.761,50.114 93.218,50.241 93.396,50.19 93.396,50.216 93.497,50.216 93.599,50.216 93.675,50.216 94.818,50.216 94.818,52.502 94.869,52.68 94.945,52.832 95.326,53.213 95.326,53.543 95.402,53.848 95.707,54.153 95.809,54.178 95.783,54.356 95.936,54.966 96.393,55.423 97.028,55.575 97.104,55.55 97.206,55.982 97.663,56.439 98.298,56.591 98.908,56.439 98.933,56.388 99.009,56.718 99.466,57.175 100.101,57.328 100.711,57.175 101.168,56.718 101.321,56.109 101.168,55.474 101.041,55.347 101.041,54.178 101.092,54.178 101.702,54.026 102.108,53.594 102.159,53.772 102.464,54.077 102.768,54.178 104.343,54.178 104.343,56.439 104.216,56.464 103.911,56.769 103.835,57.074 103.835,58.268 103.911,58.572 104.013,58.674 103.911,58.776 103.835,59.08 103.835,60.274 103.911,60.579 104.216,60.884 104.369,60.935 104.369,61.468 103.784,62.052 103.607,62.738 103.607,62.941 103.48,62.509 101.651,60.681 99.187,60.02 96.698,60.681 94.869,62.509 94.209,64.999 94.869,67.462 96.698,69.291 99.187,69.952 101.651,69.291 103.48,67.462 104.089,65.227 104.47,65.608 105.41,65.862 106.324,65.608 106.68,65.278 107.01,65.608 107.95,65.862 108.864,65.608 109.22,65.278 109.55,65.608 110.49,65.862 111.404,65.608 111.76,65.278 112.09,65.608 113.03,65.862 113.944,65.608 114.3,65.278 114.63,65.608 115.57,65.862 116.484,65.608 116.84,65.278 117.17,65.608 118.11,65.862 119.024,65.608 119.38,65.278 119.71,65.608 120.65,65.862 121.564,65.608 121.92,65.278 122.25,65.608 123.19,65.862 124.104,65.608 124.46,65.278 124.79,65.608 124.79,93.269 124.841,93.447 124.917,93.599 125.298,93.98 125.298,94.437 124.993,94.361 124.511,94.488 124.485,94.463 123.063,93.04 122.911,92.964 122.733,92.913 121.209,92.913 121.209,90.856 121.107,90.551 120.802,90.246 120.498,90.17 119.507,90.17 119.38,90.195 119.228,90.17 118.237,90.17 118.11,90.195 117.958,90.17 116.967,90.17 116.84,90.195 116.688,90.17 115.697,90.17 115.57,90.195 115.418,90.17 114.427,90.17 114.3,90.195 114.148,90.17 113.157,90.17 113.03,90.195 112.878,90.17 111.887,90.17 111.76,90.195 111.608,90.17 110.617,90.17 110.312,90.246 110.007,90.551 109.931,90.856 109.931,91.415 108.382,92.964 108.382,88.316 108.407,88.316 108.585,88.341 108.737,88.316 108.814,88.316 108.966,88.24 109.195,88.189 109.652,87.732 109.703,87.503 109.779,87.351 109.779,87.274 109.804,87.122 109.779,86.944 109.779,84.303 110.084,84.303 110.084,84.887 110.007,84.963 109.931,85.268 109.931,87.681 110.007,87.986 110.312,88.29 110.617,88.392 111.608,88.392 111.76,88.341 111.887,88.392 112.878,88.392 113.03,88.341 113.157,88.392 114.148,88.392 114.3,88.341 114.427,88.392 115.418,88.392 115.57,88.341 115.697,88.392 116.688,88.392 116.84,88.341 116.967,88.392 117.958,88.392 118.11,88.341 118.237,88.392 119.228,88.392 119.38,88.341 119.507,88.392 120.498,88.392 120.777,88.316 120.853,88.316 121.031,88.341 121.183,88.316 121.26,88.316 121.412,88.24 121.641,88.189 122.098,87.732 122.149,87.503 122.225,87.351 122.225,87.274 122.25,87.122 122.225,86.944 122.225,86.868 122.149,86.716 122.098,86.487 121.641,86.03 121.412,85.979 121.26,85.928 121.209,85.928 121.209,81.153 121.209,81.128 121.768,80.569 122.098,80.239 122.225,79.959 122.276,79.832 122.276,77.775 122.377,77.343 122.225,76.708 121.768,76.251 ; 106.553,100.99 106.731,100.99 ; 106.578,65.354 106.756,65.354 ; 107.036,27 110.185,27 ; 107.163,21.666 110.033,21.666 ; 107.696,13.386 114.097,13.386 ; 107.772,14.148 113.055,14.148 ; 107.798,27.762 110.185,27.762 ; 107.925,20.904 109.931,20.904 ; 108.229,28.524 110.185,28.524 ; 108.306,70.129 108.61,69.825 108.991,69.672 109.068,69.672 109.296,69.444 109.601,69.367 111.354,69.367 111.658,69.444 111.963,69.748 112.014,69.875 112.039,69.748 112.344,69.444 112.649,69.367 114.402,69.367 114.706,69.444 114.935,69.672 115.011,69.672 115.087,69.698 115.164,69.698 115.265,69.774 115.392,69.825 115.443,69.875 115.519,69.926 115.595,70.028 115.697,70.129 115.722,70.206 ; 108.382,88.976 124.79,88.976 ; 108.382,89.738 124.79,89.738 ; 108.382,90.5 110.033,90.5 ; 108.382,91.262 109.931,91.262 ; 108.382,92.024 109.296,92.024 ; 108.382,92.786 108.534,92.786 ; 108.636,29.286 110.185,29.286 ; 108.788,29.87 108.788,29.845 108.636,29.21 108.255,28.829 108.28,28.702 108.128,28.067 107.671,27.61 107.061,27.457 107.036,27.457 107.036,21.793 107.95,20.879 108.433,20.752 108.89,20.295 109.042,19.685 109.347,19.761 109.957,19.609 110.414,19.152 110.515,18.745 110.642,18.694 110.744,18.618 110.846,18.72 110.973,19.228 111.201,19.431 111.049,19.558 110.973,19.863 110.49,19.99 110.033,20.447 109.88,21.082 110.033,21.692 110.185,21.819 110.211,21.844 ; 108.915,20.142 110.363,20.142 ; 109.017,88.214 110.236,88.214 ; 109.118,65.354 109.296,65.354 ; 109.728,87.452 109.931,87.452 ; 109.779,84.404 110.084,84.404 ; 109.779,85.166 109.957,85.166 ; 109.779,85.928 109.931,85.928 ; 109.779,86.69 109.931,86.69 ; 110.16,10.338 111.023,10.338 ; 110.185,19.38 111.125,19.38 ; 110.211,27.305 110.185,29.642 110.236,29.82 ; 110.668,46.939 112.497,46.939 ; 110.668,47.701 117.094,47.701 ; 110.668,48.463 122.504,48.463 ; 110.668,49.225 122.504,49.225 ; 111.074,51.511 122.504,51.511 ; 111.43,49.987 122.504,49.987 ; 111.531,50.749 122.504,50.749 ; 111.633,52.273 122.504,52.273 ; 111.658,65.354 111.836,65.354 ; 111.862,5.004 112.065,5.004 ; 112.395,53.035 v1@122.504,53.035 ; 112.928,10.338 113.792,10.338 ; v1@113.106,19.253 119.558,19.253 ; 113.157,53.797 122.504,53.797 ; 113.487,18.491 116.84,18.491 ; 113.919,54.559 122.504,54.559 ; 114.071,61.417 114.579,61.417 ; 114.097,55.321 122.504,55.321 ; 114.097,56.083 122.504,56.083 ; 114.198,65.354 114.376,65.354 ; 114.427,60.655 v1@124.79,60.655 ; 114.529,56.845 122.504,56.845 ; 114.554,58.369 122.225,58.369 ; 114.605,57.607 122.428,57.607 ; 114.605,59.131 122.606,59.131 ; 114.605,59.893 124.79,59.893 ; 114.63,5.004 114.833,5.004 ; 115.545,69.926 124.79,69.926 ; 115.951,46.177 116.459,46.177 ; 116.434,46.939 112.522,46.939 ; 116.535,61.417 117.119,61.417 ; 116.738,65.354 116.916,65.354 ; 117.399,5.004 117.602,5.004 ; 118.085,47.701 122.504,47.701 ; 118.542,44.653 118.72,44.653 ; 118.542,45.415 121.437,45.415 ; 118.694,18.491 121.437,18.491 ; 118.72,46.177 122.504,46.177 ; 118.745,46.939 122.504,46.939 ; 119.075,61.417 119.659,61.417 ; 119.278,65.354 119.456,65.354 ; 119.837,43.891 120.371,43.891 ; 119.939,43.129 120.904,43.129 ; 120.167,5.004 124.993,5.004 ; 120.371,11.1 127.051,11.1 ; 120.421,44.653 118.745,44.653 ; 120.548,5.766 124.257,5.766 ; 120.548,6.528 124.054,6.528 ; 121.082,90.5 124.79,90.5 ; 121.133,11.862 127.076,11.862 ; 121.209,81.356 124.79,81.356 ; 121.209,82.118 124.79,82.118 ; 121.209,82.88 124.79,82.88 ; 121.209,83.642 124.79,83.642 ; 121.209,84.404 124.79,84.404 ; 121.209,85.166 124.79,85.166 ; 121.209,91.262 124.79,91.262 ; 121.209,92.024 124.79,92.024 ; 121.209,92.786 124.79,92.786 ; 121.31,85.928 124.79,85.928 ; 121.437,12.624 127.076,12.624 ; 121.437,13.386 127.076,13.386 ; 121.463,88.214 124.79,88.214 ; 121.615,7.29 123.85,7.29 ; 121.615,61.417 122.199,61.417 ; 121.742,80.594 124.79,80.594 ; 121.768,10.338 125.4,10.338 ; 121.818,65.354 121.996,65.354 ; 121.996,8.052 123.952,8.052 ; 121.996,8.814 124.155,8.814 ; 121.996,9.576 124.638,9.576 ; 122.149,86.69 124.79,86.69 ; 122.174,87.452 124.79,87.452 ; 122.225,76.784 124.79,76.784 ; 122.25,79.832 124.79,79.832 ; 122.276,78.308 124.79,78.308 ; 122.276,79.07 124.79,79.07 ; 122.326,77.546 124.79,77.546 ; 123.596,93.548 124.892,93.548 ; 123.749,14.148 123.876,14.148 ; 124.003,100.228 141.326,100.228 ; 124.155,61.417 124.739,61.417 ; 124.231,107.848 127.737,107.848 ; 124.257,100.99 v1@141.326,100.99 ; 124.282,59.131 124.79,59.131 ; 124.308,108.61 124.587,108.61 ; 124.358,65.354 124.536,65.354 ; 124.358,94.31 125.298,94.31 ; 124.358,99.466 125.324,99.466 ; 124.435,104.038 140.284,104.038 ; 124.587,107.086 128.499,107.086 ; 124.638,98.704 124.993,98.704 ; 124.841,104.8 139.649,104.8 ; 124.866,101.752 141.326,101.752 ; 124.866,102.514 141.326,102.514 ; 124.866,103.276 141.046,103.276 ; 124.866,105.562 139.522,105.562 ; 124.866,106.324 139.522,106.324 ; 125.527,38.125 126.441,38.125 ; 125.527,38.887 126.543,38.887 ; 125.527,39.649 128.854,39.649 ; 125.527,40.411 128.854,40.411 ; 125.527,41.173 128.854,41.173 ; 125.527,41.935 128.854,41.935 ; 125.527,42.697 128.854,42.697 ; 125.527,43.459 128.854,43.459 ; 125.527,44.221 128.854,44.221 ; 125.527,44.983 128.854,44.983 ; 125.527,45.745 128.854,45.745 ; 125.527,46.507 128.854,46.507 ; 125.527,47.269 125.705,47.269 ; 126.67,49.555 128.854,49.555 ; 126.67,50.317 128.6,50.317 ; 126.67,51.079 128.702,51.079 ; 126.67,51.841 129.87,51.841 ; 126.67,52.603 129.87,52.603 ; 126.67,53.365 129.87,53.365 ; 126.67,54.127 129.87,54.127 ; 126.67,54.889 129.87,54.889 ; 126.67,55.651 129.87,55.651 ; 126.67,56.413 129.87,56.413 ; 126.67,57.175 129.87,57.175 ; 126.67,57.937 129.87,57.937 ; 126.67,58.699 127.381,58.699 ; 126.67,59.461 126.949,59.461 ; 126.67,60.223 126.949,60.223 ; 126.67,60.985 126.949,60.985 ; 126.67,66.091 126.949,66.091 ; 126.67,66.853 126.949,66.853 ; 126.67,67.615 126.949,67.615 ; 126.67,68.377 126.949,68.377 ; 126.67,69.139 126.949,69.139 ; 126.67,69.901 126.949,69.901 ; 126.67,70.663 126.949,70.663 ; 126.67,71.425 126.949,71.425 ; 126.67,72.187 126.949,72.187 ; 126.67,72.949 126.949,72.949 ; 126.67,73.711 126.949,73.711 ; 126.67,74.473 126.949,74.473 ; 126.67,75.235 126.949,75.235 ; 126.67,75.997 126.949,75.997 ; 126.67,76.759 126.949,76.759 ; 126.67,77.521 126.949,77.521 ; 126.67,78.283 126.949,78.283 ; v1@126.67,79.045 126.949,79.045 ; 126.67,79.807 126.949,79.807 ; 126.67,80.569 126.949,80.569 ; 126.67,81.331 126.949,81.331 ; 126.67,82.093 126.949,82.093 ; 126.67,82.855 126.949,82.855 ; 126.67,83.617 126.949,83.617 ; 126.67,84.379 126.949,84.379 ; 126.67,85.141 126.949,85.141 ; 126.67,85.903 126.949,85.903 ; 126.67,86.665 126.949,86.665 ; 126.67,87.427 127,87.427 ; 126.67,88.189 127.711,88.189 ; 126.67,88.951 129.134,88.951 ; 126.67,89.713 129.134,89.713 ; 126.67,90.475 129.134,90.475 ; 126.67,91.237 129.134,91.237 ; 126.67,91.999 129.134,91.999 ; 126.721,92.761 129.134,92.761 ; 126.822,48.031 128.854,48.031 ; 126.848,108.61 127.457,108.61 ; 126.873,48.793 128.854,48.793 ; 126.949,14.91 127.076,14.91 ; 127.076,14.148 125.628,14.148 ; 127.127,99.466 141.326,99.466 ; 127.178,93.523 129.134,93.523 ; 127.178,94.285 129.134,94.285 ; 127.356,109.372 127.457,109.372 ; 127.432,110.134 127.457,110.134 ; 127.432,110.896 127.457,110.896 ; 127.457,98.704 141.326,98.704 ; 128.194,4.242 131.623,4.242 ; v1(128.27,59.69) 128.27,63.373 LCD1.5@128.27,63.5 128.27,82.296 v1(128.27,86.995) ; 128.803,88.189 129.134,88.189 ; 128.854,47.269 125.73,47.269 ; 129.134,58.699 129.87,58.699 ; 129.464,11.1 134.087,11.1 ; 129.464,11.862 130.327,11.862 ; 129.464,12.624 129.87,12.624 ; 129.464,13.386 129.972,13.386 ; 129.464,14.148 130.124,14.148 ; 129.464,14.91 130.124,14.91 ; 129.54,5.004 131.724,5.004 ; 129.591,59.461 129.87,59.461 ; 129.591,60.223 129.87,60.223 ; 129.591,60.985 129.87,60.985 ; 129.896,9.576 134.595,9.576 ; 130.277,5.766 132.283,5.766 ; 130.378,8.814 134.823,8.814 ; 130.48,6.528 134.823,6.528 ; 130.581,8.052 134.823,8.052 ; 130.683,7.29 134.823,7.29 ; 131.496,40.234 131.521,40.234 ; 131.496,40.996 134.696,40.996 ; 131.496,41.758 134.696,41.758 ; 131.496,42.52 134.696,42.52 ; 131.496,43.282 134.696,43.282 ; 131.724,44.044 134.696,44.044 ; 131.775,11.862 134.087,11.862 ; 131.826,27.864 132.766,27.864 ; 131.978,28.626 132.766,28.626 ; 132.004,14.148 134.087,14.148 ; 132.004,14.91 134.087,14.91 ; 132.004,15.672 134.366,15.672 ; 132.004,16.434 135.484,16.434 ; 132.004,17.196 136.246,17.196 ; 132.004,17.958 137.008,17.958 ; 132.004,18.72 137.77,18.72 ; 132.004,19.482 138.76,19.482 ; 132.004,20.244 139.192,20.244 ; 132.004,21.006 139.522,21.006 ; 132.004,21.768 v1@139.522,21.768 ; 132.004,22.53 139.522,22.53 ; 132.004,23.292 139.522,23.292 ; 132.004,24.054 139.522,24.054 ; 132.004,24.816 138.201,24.816 ; 132.004,25.578 137.846,25.578 ; 132.004,26.34 137.312,26.34 ; 132.004,27.102 132.918,27.102 ; 132.131,13.386 134.087,13.386 ; 132.232,12.624 134.595,12.624 ; 132.486,44.806 134.696,44.806 ; 132.588,29.388 132.766,29.388 ; 132.766,45.568 134.696,45.568 ; 132.766,46.33 134.696,46.33 ; 132.766,47.092 134.696,47.092 ; 132.766,47.854 134.696,47.854 ; 132.766,48.616 134.696,48.616 ; 132.766,49.378 134.696,49.378 ; 132.766,50.14 134.696,50.14 ; 132.766,50.902 134.696,50.902 ; 132.766,51.664 134.696,51.664 ; 133.121,40.234 134.671,40.234 ; 133.528,39.472 v1@134.823,39.472 ; 133.883,38.71 135.331,38.71 ; 134.087,10.338 129.134,10.338 ; 134.137,52.426 134.696,52.426 ; 134.29,54.712 134.696,54.712 ; 134.29,55.474 134.696,55.474 ; 134.29,56.236 134.696,56.236 ; 134.29,56.998 134.696,56.998 ; 134.29,57.76 134.696,57.76 ; 134.29,58.522 134.696,58.522 ; v1@134.29,59.284 v1@134.696,59.284 ; 134.29,60.046 134.696,60.046 ; 134.29,60.808 134.696,60.808 ; 134.341,5.766 134.823,5.766 ; 134.391,53.95 134.696,53.95 ; 134.468,61.57 134.696,61.57 ; 134.544,53.188 134.696,53.188 ; 135.89,107.086 139.522,107.086 ; 136.652,107.848 139.522,107.848 ; 137.008,108.61 137.287,108.61 ; 137.084,41.046 137.998,41.046 ; 137.084,41.808 137.998,41.808 ; 137.084,42.57 137.998,42.57 ; 137.084,43.332 137.998,43.332 ; 137.084,44.094 137.998,44.094 ; 137.084,44.856 137.998,44.856 ; 137.084,45.618 137.998,45.618 ; 137.084,46.38 137.998,46.38 ; 137.084,47.142 137.998,47.142 ; 137.084,47.904 137.998,47.904 ; 137.084,48.666 137.998,48.666 ; 137.084,49.428 137.998,49.428 ; 137.084,50.19 138.074,50.19 ; 137.084,50.952 138.76,50.952 ; 137.084,51.714 139.522,51.714 ; 137.084,52.476 140.284,52.476 ; 137.084,53.238 141.046,53.238 ; 137.084,54 141.808,54 ; 137.084,54.762 142.57,54.762 ; 137.084,55.524 143.332,55.524 ; 137.084,56.286 144.094,56.286 ; 137.084,57.048 144.475,57.048 ; 137.084,57.81 144.475,57.81 ; 137.084,58.572 137.668,58.572 ; 137.084,59.334 137.135,59.334 ; 137.084,60.096 137.109,60.096 ; 137.084,60.858 137.109,60.858 ; 137.16,39.522 137.998,39.522 ; 137.338,66.04 142.469,66.04 ; 137.668,38.76 137.998,38.76 ; 137.998,40.284 137.084,40.284 ; 138.074,66.802 142.469,66.802 ; v1(138.43,59.69) LCD1.1@138.43,63.5 ; 138.836,67.564 142.469,67.564 ; 139.167,58.572 144.475,58.572 ; 139.598,68.326 142.469,68.326 ; 139.7,59.334 144.475,59.334 ; 139.751,60.096 144.475,60.096